# EAGLE board finalpanel (EAGLE 6.4)
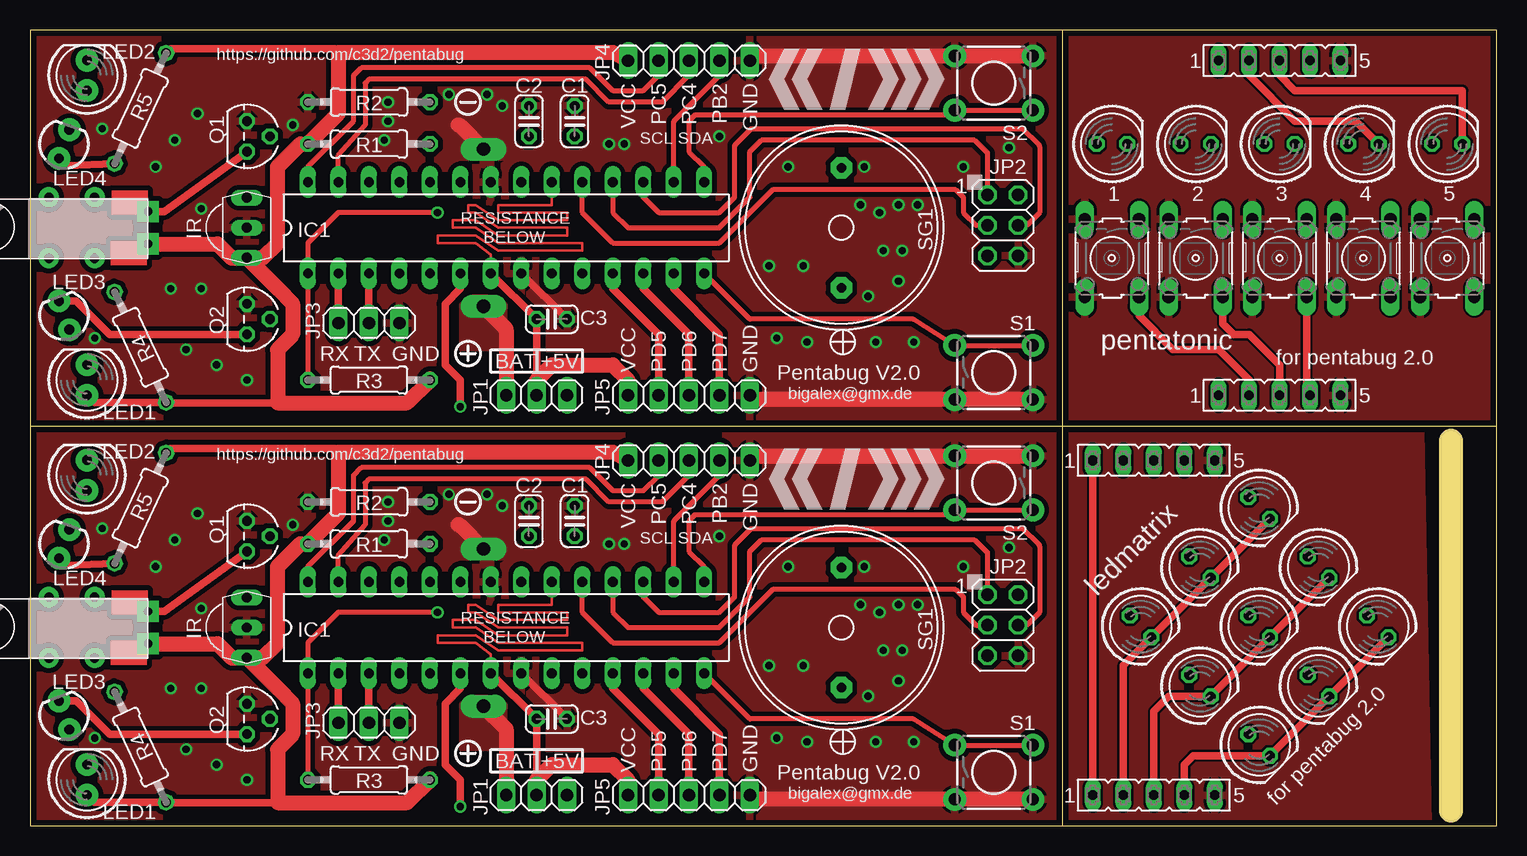
[diagram p0: board, top side]
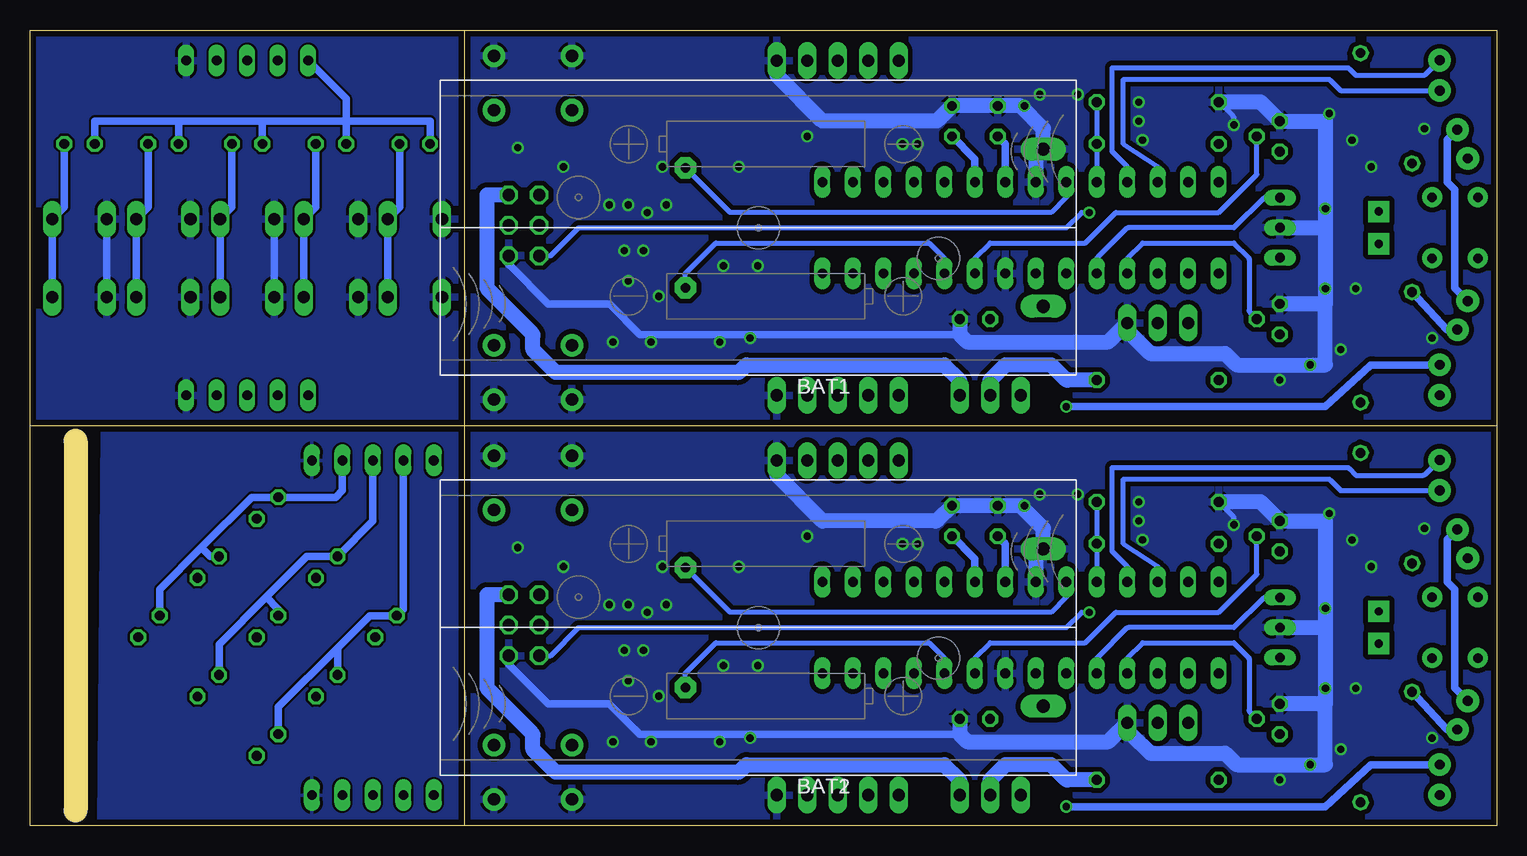
[diagram p1: board, bottom side, seen from below]

Size 122.22 x 66.34 mm. Coordinates in mm from the lower left corner, seen from the top.
Outline: 86.03,66.34 122.22,66.34 122.22,33.34
Outline: 86.03,66.34 86.03,0
Outline: 122.22,33.34 122.22,0 86.03,0
Outline: 86.03,66.34 0,66.34 0,33.34
Outline: 0,33.34 0,0 86.03,0
Outline: 0,33.34 122.22,33.34
Outline: 118.41,32.07 118.41,1.27
Copper layers (1*16): Top 0.035mm / dielectric 1.5mm / Bottom 0.035mm
Design rules "default *": minimum track width 8mil, minimum drill 0.6mm, track to track 8mil, track to pad 8mil, pad to pad 8mil, via to via 8mil, smd to smd 8mil, copper to edge 0.5mm, drill to drill 8mil, minimum pad ring 10mil, minimum via ring 8mil, stop-mask expansion 4mil, vias tented up to drill 0.8mm, thermal gap 10mil

## Footprints (pad centres in the part's own frame; a part is rotated, then mirrored left to right if it is on the bottom)
BATTERY_2XAAA_SMALLPINS = drill 1.1 pad 1.905 long: + -23.75,6.55; - -23.75,-6.55
C025-024X044 = drill 0.813 octagon: 1 -1.27,0; 2 1.27,0
DIL28-3 = drill 0.813 long: 1 -16.51,-3.81; 2 -13.97,-3.81; 3 -11.43,-3.81; 4 -8.89,-3.81; 5 -6.35,-3.81; 6 -3.81,-3.81; 7 -1.27,-3.81; 8 1.27,-3.81; 9 3.81,-3.81; 10 6.35,-3.81; 11 8.89,-3.81; 12 11.43,-3.81; 13 13.97,-3.81; 14 16.51,-3.81; 15 16.51,3.81; 16 13.97,3.81; 17 11.43,3.81; 18 8.89,3.81; 19 6.35,3.81; 20 3.81,3.81; 21 1.27,3.81; 22 -1.27,3.81; 23 -3.81,3.81; 24 -6.35,3.81; 25 -8.89,3.81; 26 -11.43,3.81; 27 -13.97,3.81; 28 -16.51,3.81
TSOP382 = drill 0.813 long: GND -0.001,-0.027; OUT -2.501,-0.027; VCC 2.499,-0.027
1X03 = drill 1.016 long: 1 -2.54,0; 2 0,0; 3 2.54,0
2X03 = drill 1.016 octagon: 1 -2.54,-1.27; 2 -2.54,1.27; 3 0,-1.27; 4 0,1.27; 5 2.54,-1.27; 6 2.54,1.27
1X05 = drill 1.016 long: 1 -5.08,0; 2 -2.54,0; 3 0,0; 4 2.54,0; 5 5.08,0
LED5MM = drill 0.813 pad 1.88: A -1.27,0; K 1.27,0
LED3MM = drill 0.813 pad 1.88: A -1.27,0; K 1.27,0
LED5MM' = drill 0.813 octagon: A -1.27,0; K 1.27,0
TO-92 = drill 0.813 octagon: 1 -1.27,0; 2 0,1.905; 3 1.27,0
0207/10 = drill 0.813 octagon: 1 -5.08,0; 2 5.08,0
TACTILE-PTH = drill 1.016 pad 1.88: 1 -3.251,2.261; 2 3.251,2.261; 3 -3.251,-2.261; 4 3.251,-2.261
B3F-10XX = drill 1.016 long: 1 -3.251,2.261; 2 3.251,2.261; 3 -3.251,-2.261; 4 3.251,-2.261
BUZZRTDK = drill 0.8 pad 1.8 octagon: + 5,0; - -5,0
FE05-1 = drill 0.813 long: 1 -5.08,0; 2 -2.54,0; 3 0,0; 4 2.54,0; 5 5.08,0
LA4-432 = drill 0.7 pad 1.778 square: P$1 -6.985,1.35; P$2 -6.985,-1.35

## Placement (x,y rotation side)
BAT1  BATTERY_2XAAA  [BATTERY_2XAAA_SMALLPINS]  61.53,49.85 180 bottom
BAT2  BATTERY_2XAAA  [BATTERY_2XAAA_SMALLPINS]  61.53,16.51 180 bottom
C1  100nF  [C025-024X044]  45.39,58.74 270 top
C2  100nF  [C025-024X044]  41.58,58.74 270 top
C3  100nF  [C025-024X044]  43.48,42.23 180 top
C4  100nF  [C025-024X044]  45.39,25.4 270 top
C5  100nF  [C025-024X044]  41.58,25.4 270 top
C6  100nF  [C025-024X044]  43.48,8.89 180 top
IC1  ATMEGA88  [DIL28-3]  39.67,49.85 0 top
IC2  ATMEGA88  [DIL28-3]  39.67,16.51 0 top
IR  TSOP382  [TSOP382]  18.09,49.85 270 top
IR1  TSOP382  [TSOP382]  18.09,16.51 270 top
JP1  [1X03]  42.21,35.88 180 top
JP2  [2X03]  81.07,50.05 270 top
JP3  [1X03]  28.25,41.91 0 top
JP4  [1X05]  54.91,63.79 0 top
JP5  [1X05]  54.91,35.88 0 top
JP6  [1X03]  28.25,8.57 0 top
JP7  [2X03]  81.07,16.71 270 top
JP8  [1X05]  54.91,2.54 0 top
JP9  [1X05]  54.91,30.45 0 top
JP10  [1X03]  42.21,2.54 180 top
LED1  [LED5MM]  4.75,37.15 90 top
LED2  [LED5MM]  4.75,62.55 90 top
LED3  [LED3MM]  2.85,42.55 110 top
LED4  [LED3MM]  2.85,56.83 70 top
LED5  [LED5MM']  90.16,56.83 0 top
LED6  [LED5MM']  97.14,56.83 0 top
LED7  [LED5MM']  104.13,56.83 0 top
LED8  [LED5MM']  111.11,56.83 0 top
LED9  [LED5MM']  118.1,56.83 0 top
LED10  [LED5MM']  102.43,26.48 315 top
LED11  [LED5MM']  107.37,21.54 315 top
LED12  [LED5MM']  112.31,16.6 315 top
LED13  [LED5MM']  97.49,21.54 315 top
LED14  [LED5MM']  102.43,16.6 315 top
LED15  [LED5MM']  107.37,11.66 315 top
LED16  [LED5MM']  92.55,16.6 315 top
LED17  [LED5MM']  97.49,11.66 315 top
LED18  [LED5MM']  102.43,6.72 315 top
LED19  [LED5MM]  4.75,3.81 90 top
LED20  [LED5MM]  4.75,29.21 90 top
LED21  [LED3MM]  2.85,9.21 110 top
LED22  [LED3MM]  2.85,23.49 70 top
Q1  [TO-92]  18.09,57.47 270 top
Q2  [TO-92]  18.09,42.23 270 top
Q3  [TO-92]  18.09,24.13 270 top
Q4  [TO-92]  18.09,8.89 270 top
R1  100K  [0207/10]  28.25,56.83 0 top
R2  22K  [0207/10]  28.25,60.33 180 top
R3  10k  [0207/10]  28.25,37.15 0 top
R4  22R  [0207/10]  9.2,39.89 295 top
R5  22R  [0207/10]  9.2,59.81 65 top
R6  10k  [0207/10]  28.25,3.81 0 top
R7  100K  [0207/10]  28.25,23.49 0 top
R8  22K  [0207/10]  28.25,26.99 180 top
R9  22R  [0207/10]  9.2,6.55 295 top
R10  22R  [0207/10]  9.2,26.47 65 top
S1  [TACTILE-PTH]  80.31,37.78 0 top
S2  [TACTILE-PTH]  80.31,61.91 180 top
S3  [B3F-10XX]  90.16,47.31 270 top
S4  [B3F-10XX]  97.14,47.31 270 top
S5  [B3F-10XX]  104.13,47.31 270 top
S6  [B3F-10XX]  111.11,47.31 270 top
S7  [B3F-10XX]  118.1,47.31 270 top
S8  [TACTILE-PTH]  80.31,28.57 180 top
S9  [TACTILE-PTH]  80.31,4.45 0 top
SG1  MULTIBUZZRTDKBUZZR  [BUZZRTDK]  67.61,49.85 270 top
SG2  MULTIBUZZRTDKBUZZR  [BUZZRTDK]  67.61,16.51 270 top
SV4  [FE05-1]  104.13,35.88 0 top
SV5  [FE05-1]  104.13,63.79 0 top
SV__4  [FE05-1]  93.65,2.54 0 top
SV__5  [FE05-1]  93.65,30.45 0 top
U$1  VIBRAMOTOR  [LA4-432]  2.85,49.85 180 top
U$2  VIBRAMOTOR  [LA4-432]  2.85,16.51 180 top

## Library data of the parts
BAT1 BAT2 IR IR1 SG1 SG2 U$1 U$2 = buglbr
C1-C6 = resistor
IC1 IC2 = atmel; OC_FARNELL: unknown; OC_NEWARK: unknown
JP1-JP10 = pinhead
LED1-LED4 LED19-LED22 S1 S2 S8 S9 = SparkFun
LED5-LED18 = led
Q1-Q4 = transistors
R1-R10 = rcl
S3-S7 = switch-omron; MPN: B3F-1000; OC_FARNELL: 176432; OC_NEWARK: 36M3542
SV4 SV5 SV__4 SV__5 = con-lsta; OC_FARNELL: unknown; OC_NEWARK: unknown

## Nets
+5V: JP1.1 JP2.2
+5V1: JP7.2 JP10.1
BAT: BAT1.+ JP1.3
BAT1: BAT2.+ JP10.3
BATLVL: IC1.24 R1.2 R2.1
BATLVL1: IC2.24 R7.2 R8.1
BUZGND: IC1.23 SG1.-
BUZGND1: IC2.23 SG2.-
BUZZR: IC1.10 SG1.+
BUZZR1: IC2.10 SG2.+
GND: BAT1.- C1.1 C2.1 C3.1 IC1.8 IC1.22 IR.GND JP2.6 JP3.3 JP4.5 JP5.5 Q1.1 Q2.1 R2.2 S1.3 S1.4 S2.3 S2.4
GND1: BAT2.- C4.1 C5.1 C6.1 IC2.8 IC2.22 IR1.GND JP6.3 JP7.6 JP8.5 JP9.5 Q3.1 Q4.1 R8.2 S8.3 S8.4 S9.3 S9.4
GND_L: SV__4.5 SV__5.5
GND_M: S3.3 S3.4 S4.3 S4.4 S5.3 S5.4 S6.3 S6.4 S7.3 S7.4 SV4.5 SV5.5
IRREC: IC1.5 IR.OUT
IRREC1: IC2.5 IR1.OUT
IRSEND: IC1.4 Q2.2
IRSEND1: IC2.4 Q4.2
MISO: IC1.18 JP2.1
MISO1: IC2.18 JP7.1
MOSI: IC1.17 JP2.4
MOSI1: IC2.17 JP7.4
N$3: IC1.26 LED2.A
N$5: IC1.25 LED2.K
N$7: LED4.A R5.1
N$8: Q1.3 U$1.P$2
N$9: C5.2 IC2.21
N$10: LED3.A R4.1
N$11: LED3.K LED4.K Q2.3
N$12: IC1.6 LED1.K
N$13: Q3.3 U$2.P$2
N$17: C2.2 IC1.21
N$19: IC2.26 LED20.A
N$20: IC2.25 LED20.K
N$21: LED22.A R10.1
N$22: LED21.A R9.1
N$23: LED21.K LED22.K Q4.3
N$24: IC2.6 LED19.K
PB1: IC2.16 JP9.4
PB2: IC1.16 JP4.4
PB2_L: LED12.K LED15.K LED18.K SV__4.4
PB2_T: LED7.K S5.1 S5.2 SV4.4
PC4_L: LED11.K LED14.K LED17.K SV__4.3
PC4_T: LED6.K S4.1 S4.2 SV4.3
PC5_L: LED10.K LED13.K LED16.K SV__4.2
PC5_T: LED5.K S3.1 S3.2 SV4.2
PD1: IC2.11 JP8.2
PD2: IC2.12 JP8.3
PD3: IC2.13 JP8.4
PD5: IC1.11 JP5.2
PD5_L: LED16.A LED17.A LED18.A SV__5.2
PD5_T: LED8.K S6.1 S6.2 SV5.2
PD6: IC1.12 JP5.3
PD6_L: LED13.A LED14.A LED15.A SV__5.3
PD6_T: LED9.K S7.1 S7.2 SV5.3
PD7: IC1.13 JP5.4
PD7_L: LED10.A LED11.A LED12.A SV__5.4
RST: IC1.1 JP2.5 R3.1
RST1: IC2.1 JP7.5 R6.1
RX: IC1.2 JP3.1
RX1: IC2.2 JP6.1
S1: IC1.14 S1.1 S1.2
S2: IC1.15 S2.1 S2.2
S3: IC2.14 S9.1 S9.2
S4: IC2.15 S8.1 S8.2
SCK: IC1.19 JP2.3
SCK1: IC2.19 JP7.3
SCL: IC1.28 JP4.2
SCL1: IC2.28 JP9.2
SDA: IC1.27 JP4.3
SDA1: IC2.27 JP9.3
TX: IC1.3 JP3.2
TX1: IC2.3 JP6.2
VCC: C1.2 C3.2 IC1.7 IC1.20 IR.VCC JP1.2 JP4.1 JP5.1 LED1.A R1.1 R3.2 R4.2 R5.2 U$1.P$1
VCC1: C4.2 C6.2 IC2.7 IC2.20 IR1.VCC JP8.1 JP9.1 JP10.2 LED19.A R6.2 R7.1 R9.2 R10.2 U$2.P$1
VCC_L: SV__4.1 SV__5.1
VCC_M: LED5.A LED6.A LED7.A LED8.A LED9.A SV5.1
VIBRATE: IC1.9 Q1.2
VIBRATE1: IC2.9 Q3.2

## Tracks (layer width: path | path; a pad name or v marks a point on that pad's centre or on a via)
+5V
  Bottom 1.27: JP2.2 84.12,52.59 84.12,44.87 arc-45 84.05,44.69 80.39,41.03 arc45 80.31,40.85 80.31,39.69 78.48,37.86 arc-45 78.3,37.78 63.27,37.78 arc-45 63.1,37.86 62.53,38.42 46.02,38.42 44.83,37.22 arc45 44.75,37.04 JP1.1
+5V1
  Bottom 1.27: JP7.2 84.12,19.25 84.12,11.54 arc-45 84.05,11.36 80.39,7.69 arc45 80.31,7.51 80.31,6.35 78.48,4.52 arc-45 78.3,4.45 63.27,4.45 arc-45 63.1,4.52 62.53,5.08 46.02,5.08 44.83,3.88 arc45 44.75,3.7 JP10.1
BAT
  Top 1.27: BAT1.+ 39.6,41.48 arc-45 39.67,41.3 JP1.3
  pour Top (no thermals): 36.82,44.13 35.86,43.5 35.86,39.69 39.67,39.69 39.67,43.5 38.09,44.13
BAT1
  Top 1.27: BAT2.+ 39.6,8.14 arc-45 39.67,7.96 JP10.3
  pour Top (no thermals): 36.82,10.79 35.86,10.16 35.86,6.35 39.67,6.35 39.67,10.16 38.09,10.79
BATLVL
  Bottom 0.406: R2.1 R1.2 IC1.24
BATLVL1
  Bottom 0.406: R8.1 R7.2 IC2.24
BUZGND
  Bottom 0.406: IC1.23 35.86,52.39 37.13,51.12 63.88,51.12 SG1.-
BUZGND1
  Bottom 0.406: IC2.23 35.86,19.05 37.13,17.78 63.88,17.78 SG2.-
BUZZR
  Bottom 0.406: SG1.+ 67.61,46.04 65.08,48.58 47.29,48.58 46.02,47.31 IC1.10
BUZZR1
  Bottom 0.406: SG2.+ 67.61,12.7 65.08,15.24 47.29,15.24 46.02,13.97 IC2.10
GND  (via drill 0.6)
  Top 0.61: IC1.8 C3.1
  Top 1.27: 35.66,58.42 arc-45 35.84,58.35 BAT1.- | JP4.5 60.31,64.1 arc-45 60.49,64.17 S2.4 S2.3 | S1.4 S1.3 60.46,35.52 arc-45 60.28,35.6 JP5.5
  Bottom 0.406: v21.89,58.42 21.89,58.95 arc-45 21.97,59.13 R2.2
  Bottom 0.61: 44.75,40.96 71.42,40.96 73.89,43.42 arc-45 74.07,43.5 79.05,43.5 82.26,46.72 arc45 82.34,46.9 JP2.6
  Bottom 1.27: IC1.22 38.4,55.78 BAT1.- 37.78,58.12 39.67,60.01 C2.1 C1.1 46.59,58.81 arc45 46.76,58.74 56.18,58.74 59.92,62.47 arc45 59.99,62.65 JP4.5 | 14.28,49.85 14.28,58.74 Q1.1 19.67,60.33 R2.2 | 14.28,49.85 14.28,43.5 | 14.28,43.5 Q2.1 | IR.GND 14.28,49.85 | C3.1 44.75,40.96 44.19,40.4 arc-45 44.01,40.32 32.48,40.32 arc-45 32.3,40.4 JP3.3 30.79,40.96 30.57,40.96 arc45 30.39,40.88 28.88,39.37 22.64,39.37 21.76,38.49 arc-45 21.58,38.42 14.28,38.42 14.28,43.5
  other vias: 29.83,58.74 29.83,60.33 29.52,57.15 34.91,60.96 57.45,57.47 38.09,60.96 39.36,60.01 48.25,56.83 49.52,56.83 63.17,54.93 69.52,54.93 81.58,56.52 77.77,54.93 73.97,51.75 72.38,51.75 70.79,51.12 69.2,51.75 72.69,47.94 71.11,47.94 64.44,46.67 61.58,46.67 72.38,45.4 69.84,44.13 62.22,40.64 64.76,40.32 70.47,40.32 73.65,40.32 18.09,37.15 15.55,38.42 13.01,39.69 11.73,44.77 14.28,44.77 14.28,51.44 10.46,54.93 12.05,57.15 13.96,59.37 6.02,58.1 5.38,40.64
  pour Top (isolate 0.406): -0.96,33.34 -0.96,67.63 86.03,67.63 86.03,33.34
  pour Bottom (isolate 0.406): -0.96,33.34 -0.96,67.63 86.03,67.94 86.03,33.66
  pour Top (no thermals): 35.55,55.56 39.99,55.56 39.99,57.47 38.4,58.74 35.55,58.74
GND1  (via drill 0.6)
  Top 0.61: IC2.8 C6.1
  Top 1.27: 35.66,25.08 arc-45 35.84,25.01 BAT2.- | JP9.5 60.31,30.76 arc-45 60.49,30.84 S8.4 S8.3 | S9.4 S9.3 60.46,2.18 arc-45 60.28,2.26 JP8.5
  Bottom 0.406: v21.89,25.08 21.89,25.61 arc-45 21.97,25.79 R8.2
  Bottom 0.61: 44.75,7.62 71.42,7.62 73.89,10.09 arc-45 74.07,10.16 79.05,10.16 82.26,13.38 arc45 82.34,13.56 JP7.6
  Bottom 1.27: IC2.22 38.4,22.44 BAT2.- 37.78,24.78 39.67,26.67 C5.1 C4.1 46.59,25.47 arc45 46.76,25.4 56.18,25.4 59.92,29.14 arc45 59.99,29.32 JP9.5 | 14.28,16.51 14.28,25.4 Q3.1 19.67,26.99 R8.2 | 14.28,16.51 14.28,10.16 | 14.28,10.16 Q4.1 | IR1.GND 14.28,16.51 | C6.1 44.75,7.62 44.19,7.06 arc-45 44.01,6.99 32.48,6.99 arc-45 32.3,7.06 JP6.3 30.79,7.62 30.57,7.62 arc45 30.39,7.55 28.88,6.03 22.64,6.03 21.76,5.15 arc-45 21.58,5.08 14.28,5.08 14.28,10.16
  other vias: 29.83,25.4 29.83,26.99 29.52,23.81 34.91,27.62 57.45,24.13 38.09,27.62 39.36,26.67 48.25,23.49 49.52,23.49 63.17,21.59 69.52,21.59 81.58,23.18 77.77,21.59 73.97,18.41 72.38,18.41 70.79,17.78 69.2,18.41 72.69,14.6 71.11,14.6 64.44,13.33 61.58,13.33 72.38,12.06 69.84,10.79 62.22,7.3 64.76,6.98 70.47,6.98 73.65,6.98 18.09,3.81 15.55,5.08 13.01,6.35 11.73,11.43 14.28,11.43 14.28,18.1 10.46,21.59 12.05,23.81 13.96,26.03 6.02,24.77 5.38,7.3
  pour Top (isolate 0.406): -0.96,0 -0.96,33.34 86.03,33.34 86.03,0
  pour Bottom (isolate 0.406): -0.96,0 -0.96,33.34 86.03,33.34 86.03,0.32
  pour Top (no thermals): 35.55,22.22 39.99,22.22 39.99,24.13 38.4,25.4 35.55,25.4
GND_L
  pour Top: 85.39,33.02 115.88,33.02 116.51,0 86.03,0
  pour Bottom: 85.71,33.02 116.19,33.02 116.51,0 86.03,0
GND_M
  Bottom 0.61: S5.3 S5.4 | S7.3 S7.4
  pour Top: 86.35,33.34 121.91,33.34 121.91,66.36 86.35,66.36
  pour Bottom: 86.35,66.36 121.91,66.36 121.91,33.34 86.35,33.34
IRREC
  Bottom 0.406: IC1.5 33.32,47.2 arc45 33.25,47.38 30.86,49.77 arc45 30.68,49.85 21.89,49.85 19.47,52.27 arc45 19.29,52.35 IR.OUT
IRREC1
  Bottom 0.406: IC2.5 33.32,13.86 arc45 33.25,14.04 30.86,16.44 arc45 30.68,16.51 21.89,16.51 19.47,18.94 arc45 19.29,19.01 IR1.OUT
IRSEND
  Bottom 0.406: IC1.4 30.79,47.31 29.52,48.58 21.89,48.58 20.7,47.38 arc45 20.62,47.2 20.62,42.97 arc-45 20.55,42.79 Q2.2
IRSEND1
  Bottom 0.406: IC2.4 30.79,13.97 29.52,15.24 21.89,15.24 20.7,14.04 arc45 20.62,13.86 20.62,9.63 arc-45 20.55,9.45 Q4.2
MISO
  Top 0.406: IC1.18 48.56,51.12 49.83,49.85 57.45,49.85 59.99,52.39 59.99,56.2 60.95,57.15 78.73,57.15 79.8,56.08 JP2.1
MISO1
  Top 0.406: IC2.18 48.56,17.78 49.83,16.51 57.45,16.51 59.99,19.05 59.99,22.86 60.95,23.81 78.73,23.81 79.8,22.74 JP7.1
MOSI
  Top 0.406: IC1.17 51.1,52.39 52.38,51.12 57.45,51.12 58.65,52.31 arc45 58.72,52.49 58.72,56.62 arc-45 58.8,56.8 60.1,58.1 82.75,58.1 84.05,56.8 arc-45 84.12,56.62 84.12,51.12 83.13,50.12 arc-45 82.95,50.05 JP2.4
MOSI1
  Top 0.406: IC2.17 51.1,19.05 52.38,17.78 57.45,17.78 58.65,18.98 arc45 58.72,19.16 58.72,23.28 arc-45 58.8,23.46 60.1,24.77 82.75,24.77 84.05,23.46 arc-45 84.12,23.28 84.12,17.78 83.13,16.78 arc-45 82.95,16.71 JP7.4
N$1  (via drill 0.8 pad 1.68)
  other vias: 1.58,52.39
N$2  (via drill 0.8 pad 1.68)
  other vias: 5.38,52.39
N$3
  Bottom 0.406: IC1.26 28.25,54.93 31.1,56.83 31.1,62.23 14.06,62.23 arc45 13.88,62.16 13.01,61.28 LED2.A
N$4  (via drill 0.8 pad 1.68)
  other vias: 5.38,47.31
N$5
  Bottom 0.406: IC1.25 30.79,54.93 32.05,56.2 32.05,63.18 12.47,63.18 arc45 12.3,63.11 11.73,62.55 6.12,62.55 arc-45 5.95,62.62 LED2.K
N$6  (via drill 0.8 pad 1.68)
  other vias: 1.58,47.31
N$7
  Top 0.61: R5.1 3.02,55.03 arc-90 LED4.A
N$8
  Top 0.61: U$1.P$2 11.18,51.2 Q1.3
N$9
  Bottom 0.61: C5.2 41.02,23.57 arc45 40.94,23.39 IC2.21
N$10
  Bottom 0.61: LED3.A 4.15,41.35 R4.1
N$11
  Top 0.61: LED3.K 3.87,43.74 6.66,40.96 Q2.3
  Bottom 0.61: LED4.K 4.12,57.19 4.12,53.66 3.48,53.02 3.48,44.81 LED3.K
N$12  (via drill 0.6)
  Top 0.61: IC1.6 35.86,44.77 34.59,43.5 34.59,38.42 35.79,37.22 arc-45 35.86,37.04 v35.86,34.92
  Bottom 0.61: v35.86,34.92 14.28,34.92 10.54,38.34 arc45 10.36,38.42 LED1.K
N$13
  Top 0.61: U$2.P$2 11.18,17.86 Q3.3
N$14  (via drill 0.8 pad 1.68)
  other vias: 1.58,19.05
N$15  (via drill 0.8 pad 1.68)
  other vias: 5.38,19.05
N$16  (via drill 0.8 pad 1.68)
  other vias: 5.38,13.97
N$17
  Bottom 0.61: C2.2 41.02,56.91 arc45 40.94,56.73 IC1.21
N$18  (via drill 0.8 pad 1.68)
  other vias: 1.58,13.97
N$19
  Bottom 0.406: IC2.26 28.25,21.59 31.1,23.5 31.1,28.89 14.06,28.89 arc45 13.88,28.82 13.01,27.94 LED20.A
N$20
  Bottom 0.406: IC2.25 30.79,21.59 32.05,22.86 32.05,29.84 12.47,29.84 arc45 12.3,29.77 11.73,29.21 6.12,29.21 arc-45 5.95,29.28 LED20.K
N$21
  Top 0.61: R10.1 3.02,21.7 arc-90 LED22.A
N$22
  Bottom 0.61: LED21.A 4.15,8.01 R9.1
N$23
  Top 0.61: LED21.K 3.87,10.4 6.66,7.62 Q4.3
  Bottom 0.61: LED22.K 4.12,23.85 4.12,20.32 3.48,19.69 3.48,11.47 LED21.K
N$24  (via drill 0.6)
  Top 0.61: IC2.6 35.86,11.43 34.59,10.16 34.59,5.08 35.79,3.88 arc-45 35.86,3.7 v35.86,1.59
  Bottom 0.61: v35.86,1.59 14.28,1.59 10.54,5.01 arc45 10.36,5.08 LED19.K
PB1
  Top 0.406: IC2.16 53.64,25.29 arc-45 53.72,25.47 57.38,29.14 arc45 57.45,29.32 JP9.4
PB2
  Top 0.406: IC1.16 53.64,58.63 arc-45 53.72,58.81 57.38,62.47 arc45 57.45,62.65 JP4.4
PB2_L
  Top 0.61: LED12.K LED15.K LED18.K 96.93,5.82 96.19,5.08 SV__4.4
PB2_T
  Top 0.61: SV4.4 106.39,35.88 S5.2
  Bottom 0.61: LED7.K 105.4,51.55 S5.1 S5.2
PC4_L
  Top 0.61: LED11.K LED14.K LED17.K 94.89,10.76 93.65,9.53 SV__4.3
PC4_T
  Top 0.61: S4.2 99.4,41.87 100.32,40.96 101.59,40.96 104.13,38.42 SV4.3
  Bottom 0.61: LED6.K 98.41,51.55 S4.1 S4.2
PC5_L
  Top 0.61: SV__4.2 91.11,13.36 92.68,14.94 LED16.K | LED16.K LED10.K | LED13.K LED16.K
PC5_T
  Top 0.61: SV4.2 101.59,37.15 99.05,39.69 95.24,39.69 92.42,42.51 S3.2
  Bottom 0.61: LED5.K 91.43,51.55 S3.1 S3.2
PD1
  Top 0.61: IC2.11 48.56,11.43 52.38,7.62 JP8.2
PD2
  Top 0.61: IC2.12 51.1,11.43 54.84,7.69 arc-45 54.91,7.51 JP8.3
PD3
  Top 0.61: IC2.13 53.64,11.43 57.45,7.62 JP8.4
PD5
  Top 0.61: IC1.11 48.56,44.77 52.38,40.96 JP5.2
PD5_L
  Bottom 0.61: SV__5.2 91.11,18.04 LED16.A 93.93,17.5 96.59,14.84 | 96.59,14.84 101.53,9.9 LED18.A | LED17.A 96.59,14.84
PD5_T
  Top 0.61: SV5.2 101.59,62.55 105.4,58.74 110.48,58.74 LED8.K
  Bottom 0.61: LED8.K 112.38,51.55 S6.1 S6.2
PD6
  Top 0.61: IC1.12 51.1,44.77 54.84,41.03 arc-45 54.91,40.85 JP5.3
PD6_L
  Bottom 0.61: 102.54,19.05 99.15,22.44 LED13.A 96.59,22.46 93.65,25.4 SV__5.3 | 102.54,19.05 106.47,15.12 LED15.A | LED14.A 101.53,18.04 102.54,19.05
PD6_T
  Top 0.61: LED9.K 119.37,61.28 105.4,61.28 104.13,62.55 SV5.3
  Bottom 0.61: LED9.K 119.37,51.55 S7.1 | S7.1 120.36,50.84 120.64,51.12 | S7.1 S7.2
PD7
  Top 0.61: IC1.13 53.64,44.77 57.45,40.96 JP5.4
PD7_L
  Bottom 0.61: 107.94,23.18 111.41,19.7 LED12.A | LED11.A 107.2,22.44 107.94,23.18 | 107.94,23.18 103.74,27.38 LED10.A 96.75,27.38 96.19,27.94 SV__5.4
RST  (via drill 0.6)
  Top 0.406: v33.96,51.12 25.71,51.12 23.16,48.58 IC1.1 R3.1
  Bottom 0.406: JP2.5 78.84,47.51 76.5,49.85 35.86,49.85 34.59,51.12 v33.96,51.12
RST1  (via drill 0.6)
  Top 0.406: v33.96,17.78 25.71,17.78 23.16,15.24 IC2.1 R6.1
  Bottom 0.406: JP7.5 78.84,14.17 76.5,16.51 35.86,16.51 34.59,17.78 v33.96,17.78
RX
  Top 0.61: JP3.1 IC1.2
RX1
  Top 0.61: JP6.1 IC2.2
S1
  Top 0.406: S1.2 S1.1 73.61,42.23 59.99,42.23 IC1.14
S2
  Top 0.406: S2.1 S2.2 76.67,59.26 55.44,59.26 54.91,58.74 54.91,56.2 56.18,54.93 IC1.15
S3
  Top 0.406: S9.2 S9.1 73.61,8.89 59.99,8.89 IC2.14
S4
  Top 0.406: S8.1 S8.2 76.67,25.92 55.44,25.92 54.91,25.4 54.91,22.86 56.18,21.59 IC2.15
SCK
  Top 0.406: IC1.19 46.02,51.12 48.56,48.58 57.45,48.58 61.9,53.02 77.14,53.02 77.77,52.39 77.77,51.12 78.84,50.05 JP2.3
SCK1
  Top 0.406: IC2.19 46.02,17.78 48.56,15.24 57.45,15.24 61.9,19.69 77.14,19.69 77.77,19.05 77.77,17.78 78.84,16.71 JP7.3
SCL
  Top 0.406: JP4.2 52.38,62.55 51.1,61.28 48.56,61.28 46.66,63.18 27.61,63.18 26.98,62.55 26.98,58.74 23.16,54.93 IC1.28
SCL1
  Top 0.406: JP9.2 52.38,29.21 51.1,27.94 48.56,27.94 46.66,29.84 27.61,29.84 26.98,29.21 26.98,25.4 23.16,21.59 IC2.28
SDA
  Top 0.406: JP4.3 54.91,62.55 52.69,60.33 48.25,60.33 46.34,62.23 28.25,62.23 27.93,61.91 27.93,58.42 25.71,55.88 IC1.27
SDA1
  Top 0.406: JP9.3 54.91,29.21 52.69,26.99 48.25,26.99 46.34,28.89 28.25,28.89 27.93,28.57 27.93,25.08 25.71,22.54 IC2.27
TX
  Top 0.61: JP3.2 IC1.3
TX1
  Top 0.61: JP6.2 IC2.3
VCC
  Top 0.203: IC1.7 38.4,47.62 37.13,48.58 33.96,48.58 33.96,49.21 37.13,49.21 39.04,47.94 46.02,47.94 46.02,48.58 39.04,48.58 37.13,49.85 35.23,49.85 35.23,50.48 37.13,50.48 39.04,49.21 44.75,49.21 44.75,49.85 39.04,49.85 37.13,51.12 36.5,51.12 36.5,51.75 37.13,51.75 39.04,50.48 44.75,50.48 44.75,51.12 39.04,51.12 39.04,51.75 43.48,51.75 IC1.20
  Top 0.61: IC1.7 C3.2 42.21,37.15 | 25.71,64.45 25.39,64.77 11.73,64.77 11.23,64.58 R5.2 | LED1.A 5.27,35.36 arc45 5.45,35.28 R4.2 arc45 11.44,35.24 20.62,35.24
  Top 1.27: JP4.1 48.56,64.45 25.71,64.45 25.71,59.37 R1.1 22.53,56.83 20.62,54.93 20.62,48.58 19.4,47.35 IR.VCC | U$1.P$1 15.62,48.5 16.82,47.31 18.02,47.31 IR.VCC | JP5.1 49.83,37.15 48.56,38.42 43.48,38.42 42.21,37.15 JP1.2 | IR.VCC 20.62,44.78 20.62,44.77 21.89,43.5 21.89,40.96 20.62,39.69 20.62,35.24 31.32,35.24 arc45 31.49,35.32 33.25,37.07 arc45 33.32,37.25 R3.2
  Bottom 0.61: IC1.20 43.48,55.46 arc-45 43.56,55.64 C1.2
  Bottom 1.27: 42.21,37.15 JP1.2 42.21,37.04 arc45 42.14,37.22 40.94,38.42 37.13,38.42 35.94,37.22 arc-45 35.76,37.15 R3.2
VCC1
  Top 0.203: IC2.7 38.4,14.29 37.13,15.24 33.96,15.24 33.96,15.88 37.13,15.88 39.04,14.6 46.02,14.6 46.02,15.24 39.04,15.24 37.13,16.51 35.23,16.51 35.23,17.15 37.13,17.15 39.04,15.88 44.75,15.88 44.75,16.51 39.04,16.51 37.13,17.78 36.5,17.78 36.5,18.42 37.13,18.42 39.04,17.15 44.75,17.15 44.75,17.78 39.04,17.78 39.04,18.42 43.48,18.42 IC2.20
  Top 0.61: IC2.7 C6.2 42.21,3.81 | 25.71,31.11 25.39,31.43 11.73,31.43 11.23,31.24 R10.2 | LED19.A 5.27,2.02 arc45 5.45,1.95 R9.2 arc45 11.44,1.9 20.62,1.9
  Top 1.27: JP9.1 48.56,31.11 25.71,31.11 25.71,26.03 R7.1 22.53,23.5 20.62,21.59 20.62,15.24 19.4,14.01 IR1.VCC | U$2.P$1 15.62,15.16 16.82,13.97 18.02,13.97 IR1.VCC | JP8.1 49.83,3.81 48.56,5.08 43.48,5.08 42.21,3.81 JP10.2 | IR1.VCC 20.62,11.44 20.62,11.43 21.89,10.16 21.89,7.62 20.62,6.35 20.62,1.9 31.32,1.9 arc45 31.49,1.98 33.25,3.74 arc45 33.32,3.92 R6.2
  Bottom 0.61: IC2.20 43.48,22.12 arc-45 43.56,22.3 C4.2
  Bottom 1.27: 42.21,3.81 JP10.2 42.21,3.7 arc45 42.14,3.88 40.94,5.08 37.13,5.08 35.94,3.88 arc-45 35.76,3.81 R6.2
VCC_L
  Top 0.61: SV__5.1 SV__4.1
VCC_M
  Bottom 0.61: SV5.1 95.87,60.61 95.87,58.74 | LED5.A 88.89,58.74 95.87,58.74 | LED6.A 95.87,58.74 | 95.87,58.74 102.86,58.74 | 102.86,58.74 109.84,58.74 | 109.84,58.74 116.83,58.74 LED9.A | LED7.A 102.86,58.74 | LED8.A 109.84,58.74
VIBRATE
  Bottom 0.406: IC1.9 43.48,47.31 42.21,48.58 34.28,48.58 31.74,51.12 23.16,51.12 19.99,54.29 Q1.2
VIBRATE1
  Bottom 0.406: IC2.9 43.48,13.97 42.21,15.24 34.28,15.24 31.74,17.78 23.16,17.78 19.99,20.95 Q3.2

## Text on the board
tNames: https://github.com/c3d2/pentabug | VCC | PC5 | PC4 | PB2 | GND | SCL | SDA | 1 | 1 | 2 | 3 | 4 | 5 | RESISTANCE | IR | BELOW | pentatonic | RX | TX | GND | BAT | +5V | for pentabug 2.0 | VCC | PD5 | PD6 | PD7 | GND | Pentabug V2.0 | bigalex@gmx.de | LED2 | https://github.com/c3d2/pentabug | JP4 | VCC | PC5 | PC4 | PB2 | GND | C2 | C1 | R2 | R5 | S2 | Q1 | SCL | SDA | R1 | JP2 | LED4 | 1 | ledmatrix | IC1 | RESISTANCE | IR | BELOW | SG1 | LED3 | S1 | C3 | Q2 | JP3 | R4 | RX | TX | GND | BAT | +5V | VCC | PD5 | PD6 | PD7 | GND | R3 | Pentabug V2.0 | bigalex@gmx.de | JP1 | JP5 | for pentabug 2.0 | LED1
_bNames: BAT1 | BAT1